# Altium PCB BioZ.PcbDoc (part 3 of 3)
Units mm, origin at the board's own origin, x right, y up, seen from the top; angles counter-clockwise.
Board outline 88 x 75 mm, 4 copper layers (Top Layer, GND1, GND 2, Bottom Layer), stack 1.564 mm thick; 175 components, 112 nets, 533 pads, 354 vias.
Unrouted connection lines stored in the file: 5.
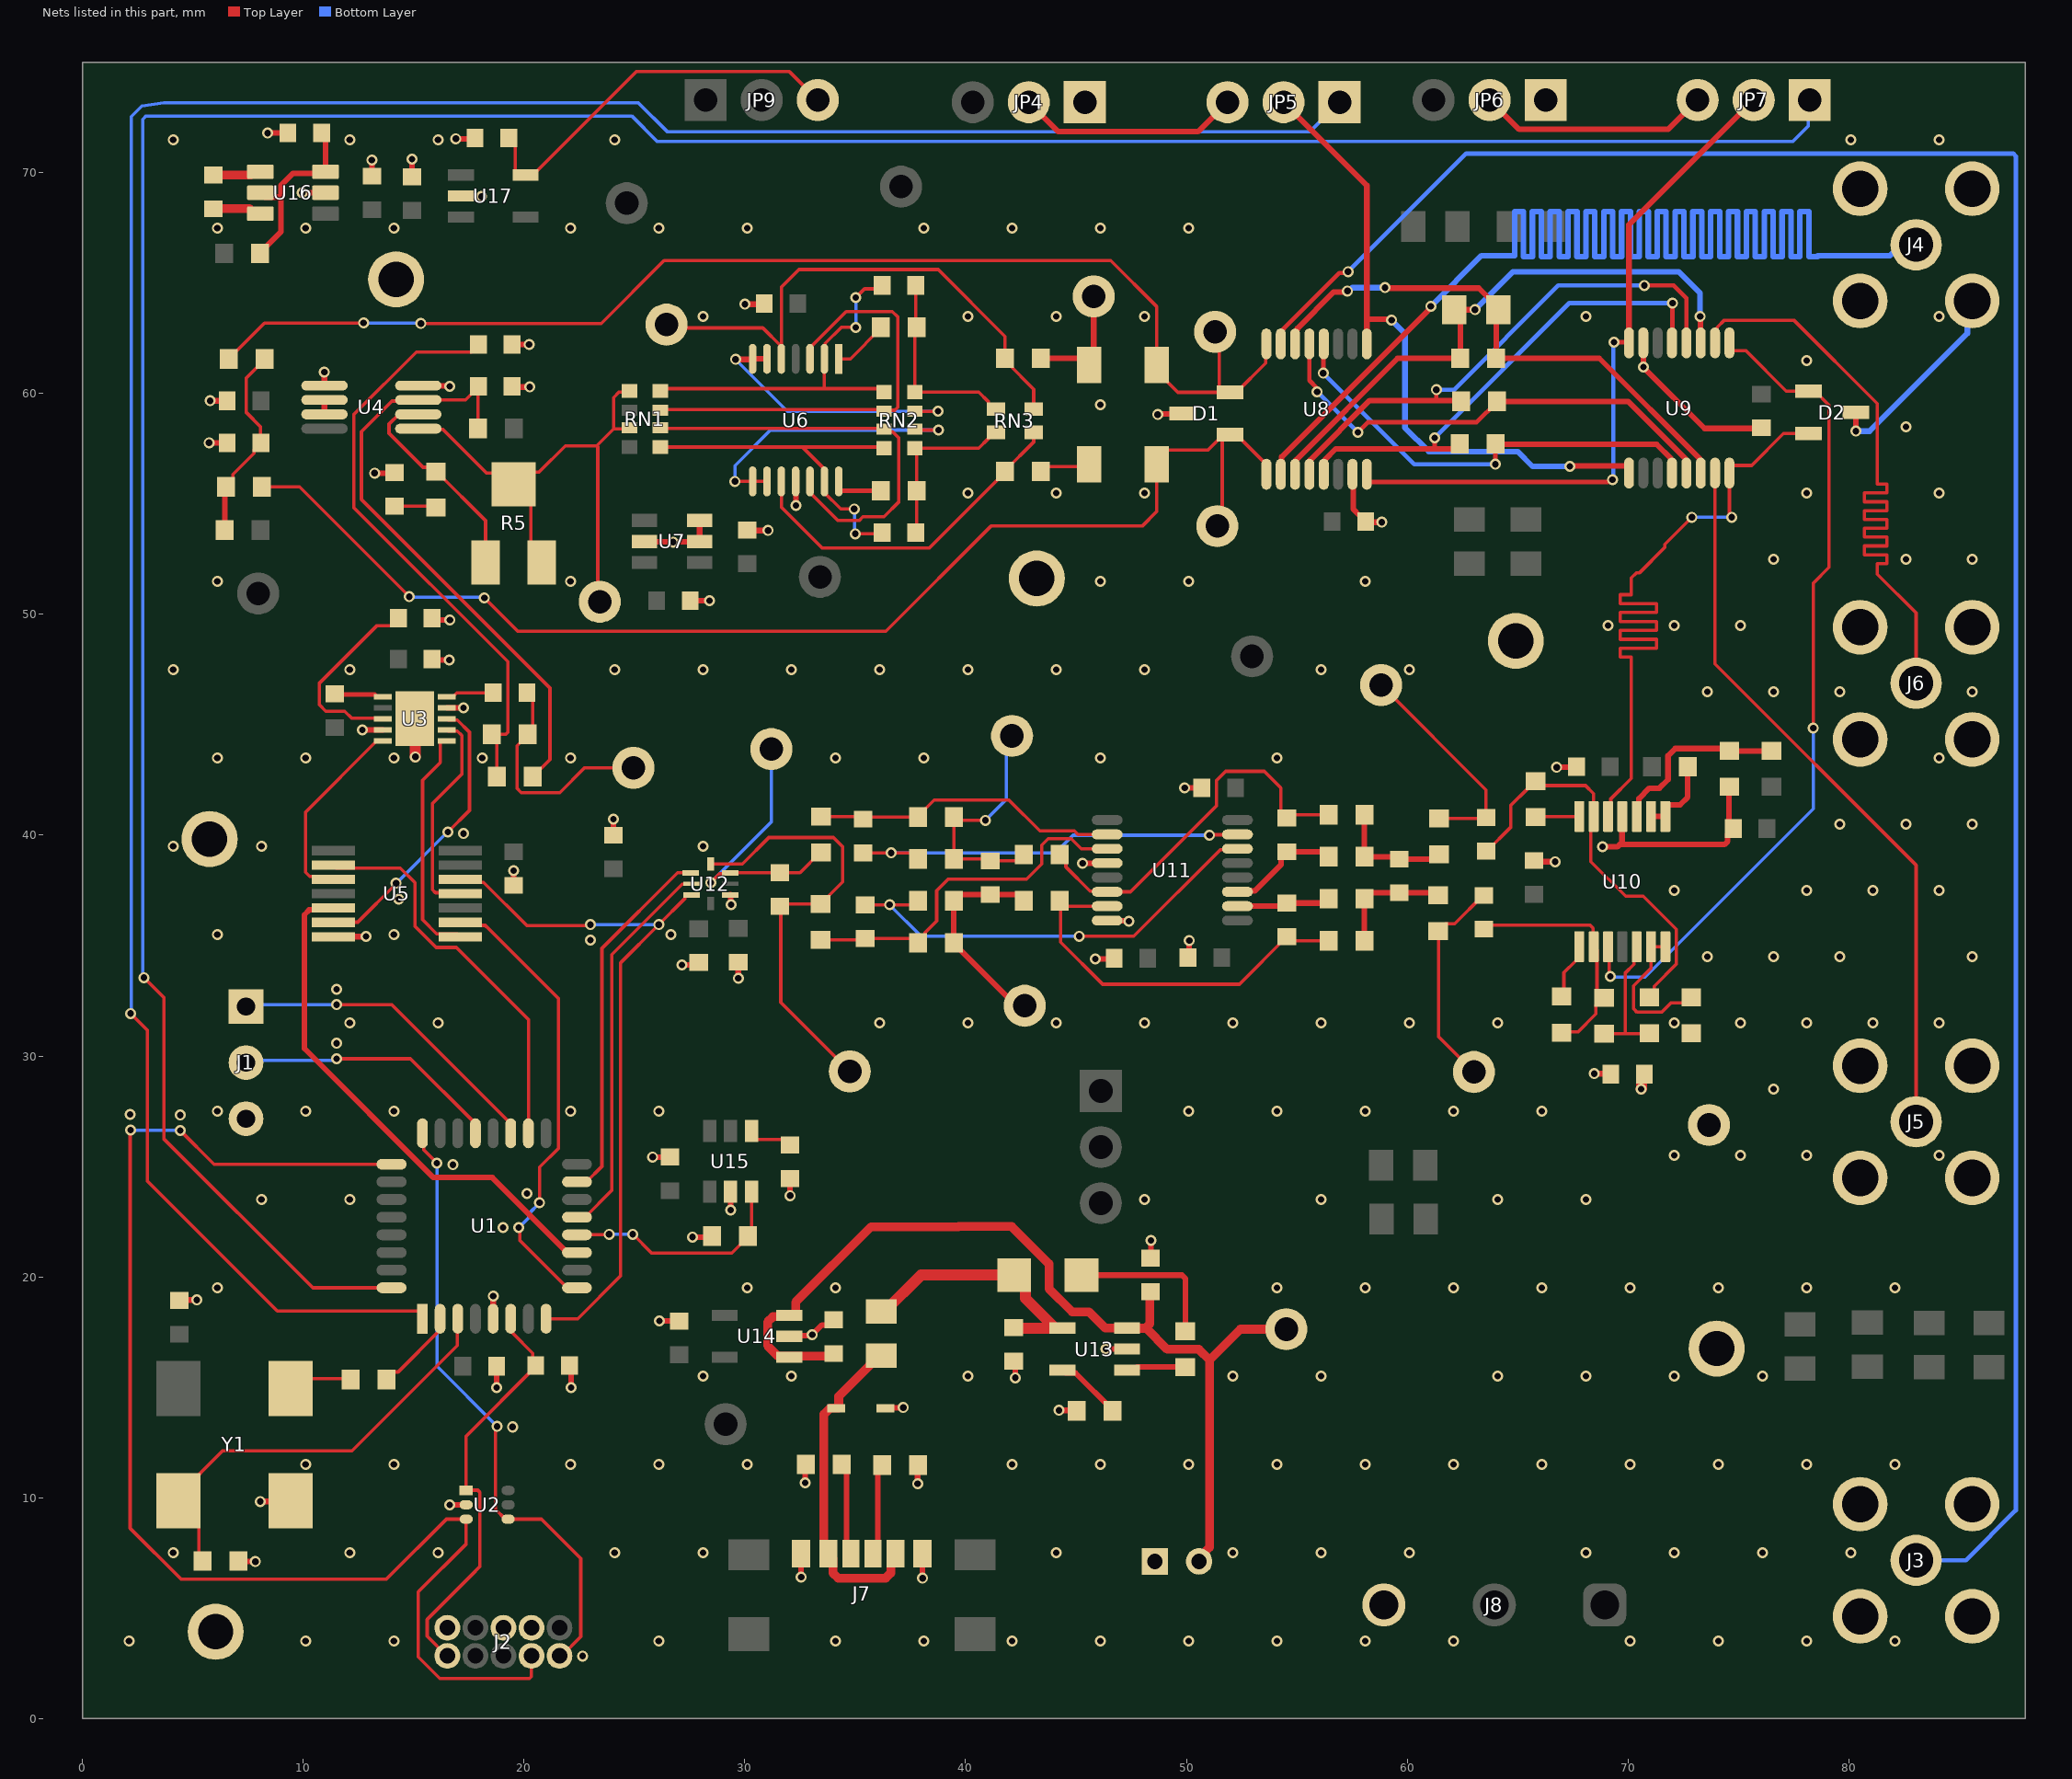
[diagram p4: the nets of this part, all layers, seen from the top]

## Via types
v1: diameter 0.5, hole 0.3, Top Layer to Bottom Layer, tented both sides, 354 vias

## Nets (pads, with @x,y where several pads share a name; then routed paths per layer and width w, separated by ;. In a path a pad name is that pad's centre, name@x,y a point inside that pad or via, vN(x,y) a via of type N, cw(c..) or ccw(c..) an arc to the next point about the centre after c; other vN are vias at no path point) (continued)
+V_BAT: C43.1 C44.1 P1.2 U13.3 U14.1 U14.3 VBAT.1 | length 45.3
  Top Layer w0.4: C44.1@34.025,16.526 33.903,16.404 32.066,16.404 U14.1@32.012,16.35 31.958,16.404 31.503,16.404 31.026,16.88 31.026,17.951 31.271,18.196 32.193,18.196 32.301,18.304 32.301,18.851 35.719,22.269 39.681,22.269 39.687,22.275 42.091,22.275 43.775,20.591 43.775,19.459 44.823,18.411 45.589,18.411 46.325,17.675 U13.3@47.312,17.675 47.572,17.675 48.146,17.675 48.337,17.866 C43.1@48.337,19.325 ; U13.3@47.559,17.675 47.572,17.662 48.188,17.662 49.131,16.719 50.56,16.719 51.05,16.229 ; P1.2@50.575,7.11 50.575,7.269 51.05,7.744 51.05,16.229 ; VBAT.1@54.525,17.625 52.446,17.625 51.05,16.229
+V_USB: C42.1 D4.1 F1.2 U13.4 | length 12.1
  Top Layer w0.5: F1.2@36.18,18.425 36.328,18.425 37.978,20.075 D4.1@42.201,20.075 42.713,19.563 42.713,19.017 U13.4@44.051,17.679 ; C42.1@42.175,17.7 42.2,17.675 U13.4@44.388,17.675
A0: JP5.2 U8.1 U9.1 | length 29.9
  Top Layer w0.254: JP5.2@54.4,73.2 58.175,69.425 58.175,63.363 ; U8.1@58.175,62.25 58.175,63.363 ; v1(59.3,63.325) 59.262,63.363 58.175,63.363 ; v1(67.375,56.7) 67.406,56.731 69.959,56.731 70.05,56.64 U9.1@70.05,56.4
  Bottom Layer w0.254: v1(59.3,63.325) 59.905,62.72 59.905,58.452 60.981,57.377 65.008,57.377 65.685,56.7 v1(67.375,56.7)
A1: JP7.2 U8.16 U9.16 | length 31.7
  Top Layer w0.2: U8.16@58.175,56.35 58.175,56.111 58.29,55.996 69.115,55.996 69.219,56.1 v1(69.3,56.1) ; v1(69.375,62.325) 70.025,62.325 U9.16@70.05,62.3
  Top Layer w0.254: U9.16@70.05,62.3 70.05,67.65 JP7.2@75.7,73.3
  Bottom Layer w0.2: v1(69.3,56.1) 69.337,56.137 69.337,62.288 v1(69.375,62.325)
BLEED: DNP12.2 R12.1 R13.2 R14.1 | length 9
  Top Layer w0.15: R13.2@6.499,55.775 6.806,56.081 6.806,56.338 7.768,57.3 7.768,57.469 DNP12.2@8.074,57.775 8.06,57.789 8.06,58.5 7.418,59.142 7.418,60.717 8.238,61.537 R12.1@8.238,61.575
  Top Layer w0.254: R14.1@6.437,53.825 6.437,55.713 R13.2@6.499,55.775
CAL_CAP_NEG: C22.1 R17.1 U8.6 U9.6 | length 25.1
  Top Layer w0.254: U8.6@54.925,62.25 54.925,62.778 55.023,62.876 55.023,62.954 56.672,64.603 57.253,64.603 v1(57.3,64.65) ; v1(59,64.8) 59.023,64.777 63.248,64.777 64.125,63.9 C22.1@64.125,63.8 64.038,63.713 R17.1@64.038,61.6 68.706,61.6 73.262,57.043 73.262,56.438 U9.6@73.3,56.4
  Bottom Layer w0.254: v1(57.3,64.65) 57.367,64.65 57.517,64.8 v1(59,64.8)
CAL_CAP_POS: C22.2 R17.2 U8.11 U9.11 | length 26.9
  Top Layer w0.254: U8.11@54.925,56.35 54.963,56.388 54.963,56.993 59.569,61.6 R17.2@62.412,61.6 62.412,63.513 C22.2@62.125,63.8 v1(63.071,63.8) ; v1(73.275,63.5) 73.287,63.488 73.287,62.313 U9.11@73.3,62.3
  Bottom Layer w0.254: v1(63.071,63.8) 64.796,65.525 72.3,65.525 73.275,64.55 v1(73.275,63.5)
CAL_HIGH_NEG: R16.1 U8.5 U9.5 | length 22.1
  Top Layer w0.2: U8.5@55.575,62.25 55.575,60.6 55.93,60.245 55.93,60.08 v1(55.925,60.075) ; v1(57.775,58.25) 58.231,58.706 63.157,58.706 64.063,59.612 R16.1@64.063,59.65
  Top Layer w0.254: R16.1@64.063,59.65 70.006,59.65 72.612,57.043 72.612,56.438 U9.5@72.65,56.4
  Bottom Layer w0.2: v1(55.925,60.075) 55.937,60.075 57.762,58.25 v1(57.775,58.25)
CAL_HIGH_POS: R16.2 U8.12 U9.12 | length 24.6
  Top Layer w0.2: 61.325,59.688 v1(61.325,60.175) ; v1(70.75,64.9) 72.075,64.9 72.65,64.325 U9.12@72.65,62.3
  Top Layer w0.254: U8.12@55.575,56.35 55.613,56.388 55.613,56.993 58.307,59.688 61.325,59.688 62.399,59.688 R16.2@62.437,59.65
  Bottom Layer w0.2: v1(61.325,60.175) 62.125,60.175 66.85,64.9 v1(70.75,64.9)
CAL_LOW_NEG: R15.1 U8.4 U9.4 | length 20.7
  Top Layer w0.2: v1(56.2,60.925) 56.212,60.937 56.212,62.238 U8.4@56.225,62.25 ; v1(64,56.8) 64,57.712 R15.1@64.013,57.725
  Top Layer w0.254: R15.1@64.013,57.725 64.032,57.706 71.3,57.706 71.962,57.043 71.962,56.438 U9.4@72,56.4
  Bottom Layer w0.2: v1(56.2,60.925) 60.325,56.8 v1(64,56.8)
CAL_LOW_POS: R15.2 U8.13 U9.13 | length 22.7
  Top Layer w0.2: 61.25,57.499 v1(61.25,58) ; U9.13@72,62.3 72.013,62.313 72.013,64.087 v1(72.025,64.1)
  Top Layer w0.254: U8.13@56.225,56.35 56.263,56.388 56.263,56.993 56.769,57.499 61.25,57.499 62.2,57.499 R15.2@62.387,57.687
  Bottom Layer w0.2: v1(61.25,58) 67.35,64.1 v1(72.025,64.1)
EXC_EXT_NEG: J3.SIG U8.7 | length 104
  Top Layer w0.2: U8.7@54.275,62.25 54.275,62.793 54.4,62.918 54.4,62.942 56.925,65.468 57.268,65.468 v1(57.325,65.525)
  Bottom Layer w0.2: v1(57.325,65.525) 62.675,70.875 87.458,70.875 87.575,70.758 87.575,9.424 85.311,7.16 J3.SIG@83.06,7.16
EXC_EXT_POS: J4.SIG U8.10 | length 102.6
  Top Layer w0.254: U8.10@54.275,56.35 54.313,56.388 54.313,57.132 61.071,63.89 v1(61.071,63.95)
  Bottom Layer w0.254: v1(61.071,63.95) 63.371,66.25 64.739,66.25 64.866,66.25 64.866,68.241 65.27,68.241 65.27,66.209 65.674,66.209 65.674,68.241 66.078,68.241 66.078,66.209 66.482,66.209 66.482,68.241 66.886,68.241 66.886,66.209 67.29,66.209 67.29,68.241 67.694,68.241 67.694,66.209 68.098,66.209 68.098,68.241 68.502,68.241 68.502,66.209 68.906,66.209 68.906,68.241 69.31,68.241 69.31,66.209 69.714,66.209 69.714,68.241 70.118,68.241 70.118,66.209 70.522,66.209 70.522,68.241 70.926,68.241 70.926,66.209 71.33,66.209 71.33,68.241 71.734,68.241 71.734,66.209 72.138,66.209 72.138,68.241 72.542,68.241 72.542,66.209 72.946,66.209 72.946,68.241 73.35,68.241 73.35,66.209 73.754,66.209 73.754,68.241 74.158,68.241 74.158,66.209 74.562,66.209 74.562,68.241 74.966,68.241 74.966,66.209 75.37,66.209 75.37,68.241 75.774,68.241 75.774,66.209 76.178,66.209 76.178,68.241 76.582,68.241 76.582,66.209 76.986,66.209 76.986,68.241 77.39,68.241 77.39,66.209 77.794,66.209 77.794,68.241 78.198,68.241 78.198,66.209 78.602,66.209 78.602,66.25 78.749,66.25 81.876,66.25 81.969,66.344 82.664,66.344 J4.SIG@83.06,66.74
FSYNC/SPI1_NSS1: U1.11 U5.5 | length 23.7
  Top Layer w0.254: U5.5@11.35,36.7 11.266,36.617 10.266,36.617 10.045,36.396 10.045,30.339 15.886,24.498 18.554,24.498 21.952,21.1 U1.11@22.393,21.1
FSYNC/SPI1_NSS1_BUF: U3.8 U5.6 | length 13.1
  Top Layer w0.15: U5.6@11.35,36.05 11.36,36.06 12.464,36.06 14.2,37.795 v1(14.2,37.825) ; U3.8@16.495,45.275 16.548,45.223 16.968,45.223 17.524,44.666 17.524,41.124 v1(16.55,40.15)
  Bottom Layer w0.15: v1(14.2,37.825) 14.212,37.825 16.537,40.15 v1(16.55,40.15)
GND: C1.2 C2.1 C4.2 C5.2 C6.2 C7.2 C9.2 C10.1 C11.1 C12.2 C14.2 C18.2 C19.2 C20.2 C21.2 C23.2 C26.2 C29.2 C30.2 C34.2 C35.2 C38.2 C39.2 C40.2 C41.2 C42.2 C43.2 C44.2 C45.2 C46.2 C47.2 C48.2 C50.2 C51.2 C52.2 D1.3 D2.3 D3.2 DNP12.1 GND.1 J1.3 J2.3 J2.5 J2.9 J3.SHLD J4.SHLD J7.A12 J7.B12 J8.3 JP4.1 JP6.1 P1.1 R7.1 R38.1 R40.2 R41.2 R43.2 R44.1 U1.5 U2.2 U3.4 U3.9 U3.11 U4.4 U4.5 U5.7 U6.11 U7.2 U7.3 U7.5 U8.15 U9.15 U10.11 U11.12 U11.16 U12.5 U13.2 U14.2 U15.2 U16.2 U17.2 Y1.2 | length 88.4
  Top Layer w0.254: C11.1@4.375,18.925 4.401,18.951 v1(5.175,18.951) ; v1(5.725,57.775) DNP12.1@6.55,57.775 ; v1(5.775,59.675) C9.2@6.55,59.675 ; R7.1@7.063,7.125 7.088,7.1 v1(7.825,7.1) ; v1(8.05,9.825) 9.38,9.825 Y1.2@9.415,9.86 ; v1(8.375,71.8) C48.2@9.3,71.8 ; v1(9.95,69.1) U16.2@11,69.1 ; v1(10.95,60.975) 10.95,60.366 U4.5@10.953,60.363 ; U5.7@11.35,35.4 11.355,35.405 12.831,35.405 v1(12.836,35.41) ; v1(12.675,44.775) U3.4@13.605,44.775 ; C51.2@13.1,69.849 v1(13.1,70.575) ; v1(13.225,56.4) 14.1,56.4 C10.1@14.125,56.425 ; U3.11@14.925,45.15 U3.11@15.05,45.275 U3.11@15.075,45.25 ; C50.2@14.925,69.824 v1(14.925,70.624) ; U4.4@15.203,60.363 15.222,60.344 16.606,60.344 v1(16.625,60.325) ; C5.2@15.824,49.825 15.902,49.747 v1(16.635,49.747) ; C4.2@15.825,47.975 15.867,47.933 v1(16.613,47.933) ; U3.9@16.495,45.775 v1(17.25,45.775) ; v1(16.625,9.675) U2.2@17.375,9.675 ; v1(16.906,71.545) 17.746,71.545 C52.2@17.776,71.575 ; U17.2@17.138,68.95 17.15,68.937 18.063,68.937 v1(18.075,68.925) ; U1.5@18.593,18.1 18.597,18.104 18.597,19.122 v1(18.6,19.125) ; v1(18.75,14.975) C1.2@18.75,15.95 ; C7.2@19.449,60.325 19.474,60.3 v1(20.25,60.3) ; C6.2@19.449,62.225 v1(20.225,62.225) ; C12.2@19.525,37.726 v1(19.525,38.4) ; C2.1@22.05,15.975 22.125,15.9 v1(22.125,14.975) ; C35.2@24.05,39.999 v1(24.05,40.725) ; U7.5@25.45,53.3 25.463,53.287 26.738,53.287 v1(26.75,53.275) 26.762,53.287 27.937,53.287 U7.2@27.95,53.3 U7.3@27.95,54.25 ; v1(25.825,25.425) C46.2@26.6,25.425 ; v1(26.125,18) 27.024,18 C45.2@27.027,17.996 ; v1(27.15,34.125) 27.796,34.125 C38.2@27.909,34.238 ; C18.2@27.525,50.625 v1(28.4,50.625) ; v1(27.625,21.8) 28.462,21.8 R44.1@28.512,21.85 ; U12.5@29.325,37.3 29.348,37.3 29.35,37.298 29.35,36.875 v1(29.375,36.85) ; v1(29.35,23.025) U15.2@29.35,23.85 ; v1(29.7,33.525) C39.2@29.7,34.251 ; v1(30,64.05) 30.85,64.05 C14.2@30.875,64.075 ; C19.2@30.1,53.824 30.124,53.8 v1(31.05,53.8) ; U14.2@32.012,17.3 32.05,17.337 33.012,17.337 33.496,17.821 33.796,17.821 C44.2@34.025,18.05 ; v1(32.05,23.675) C47.2@32.05,24.451 ; U6.11@32.3,56.025 32.313,56.012 v1(32.313,54.937) ; v1(32.55,6.4) J7.B12@32.55,7.455 ; v1(32.725,10.675) 32.725,11.463 R41.2@32.762,11.5 ; D3.2@36.368,14.05 36.381,14.062 37.162,14.062 v1(37.175,14.075) ; v1(37.825,10.625) 37.825,11.462 R40.2@37.838,11.475 ; v1(38.05,6.35) J7.A12@38.05,7.455 ; C42.2@42.175,16.176 42.25,16.101 v1(42.25,15.425) ; v1(44.225,13.95) 45.012,13.95 R43.2@45.037,13.925 ; v1(45.3,38.725) 45.305,38.73 46.406,38.73 U11.12@46.412,38.736 ; v1(45.875,34.4) 46.701,34.4 C29.2@46.726,34.425 ; v1(46.35,16.725) U13.2@47.312,16.725 ; U11.16@46.412,36.136 46.43,36.118 47.382,36.118 v1(47.4,36.1) ; C43.2@48.375,20.849 48.4,20.874 v1(48.4,21.65) ; v1(48.7,59.05) 48.725,59.075 49.805,59.075 D1.3@49.83,59.1 ; v1(49.925,42.15) C34.2@50.701,42.15 ; C30.2@50.076,34.45 50.132,34.506 v1(50.132,35.232) ; U8.15@57.525,56.35 57.563,56.312 57.563,54.761 57.832,54.492 57.87,54.492 58.124,54.238 C20.2@58.124,54.2 58.149,54.175 v1(58.85,54.175) ; C23.2@65.75,38.849 65.799,38.8 v1(66.7,38.8) ; v1(66.775,43.075) 67.651,43.075 C41.2@67.676,43.1 ; v1(68.475,29.2) 69.2,29.2 C26.2@69.225,29.175 ; v1(68.85,39.475) 69.525,39.475 69.625,39.575 ; U10.11@69.75,40.85 69.735,40.835 69.735,39.685 69.625,39.575 ; U9.15@70.7,62.3 v1(70.7,61.2) 73.475,58.425 76.024,58.425 C21.2@76.05,58.451 ; R38.1@74.6,42.187 74.587,42.2 74.587,40.489 C40.2@74.776,40.3 74.522,40.046 74.522,39.724 74.373,39.575 69.625,39.575 ; D2.3@80.32,59.15 80.325,59.145 v1(80.325,58.3)
  Top Layer w0.5: v1(15.075,43.55) U3.11@15.075,45.25
  Bottom Layer w0.254: v1(80.325,58.3) 80.95,58.3 85.38,62.73 85.38,63.98 J4.SHLD@85.6,64.2
  other v1: 22.65,2.825 2.1,3.5 10.1,3.5 14.1,3.5 26.1,3.5 34.1,3.5 38.1,3.5 42.1,3.5 46.1,3.5 50.1,3.5 54.1,3.5 58.1,3.5 62.1,3.5 70.1,3.5 74.1,3.5 78.1,3.5 82.1,3.5 4.1,7.5 12.1,7.5 16.1,7.5 24.1,7.5 28.1,7.5 44.1,7.5 52.1,7.5 56.1,7.5 60.1,7.5 68.1,7.5 72.1,7.5 76.1,7.5 80.1,7.5 10.1,11.5 14.1,11.5 22.1,11.5 26.1,11.5 30.1,11.5 42.1,11.5 46.1,11.5 50.1,11.5 54.1,11.5 58.1,11.5 62.1,11.5 66.1,11.5 70.1,11.5 74.1,11.5 78.1,11.5 82.1,11.5 19.475,13.2 28.1,15.5 32.1,15.5 40.1,15.5 52.1,15.5 56.1,15.5 64.1,15.5 68.1,15.5 72.1,15.5 76.1,15.5 33.05,17.375 6.1,19.5 30.1,19.5 34.1,19.5 54.1,19.5 58.1,19.5 62.1,19.5 66.1,19.5 70.1,19.5 74.1,19.5 78.1,19.5 82.1,19.5 19.05,22.225 8.1,23.5 12.1,23.5 48.1,23.5 56.1,23.5 64.1,23.5 68.1,23.5 20.125,23.775 16.775,25.075 4.425,27.325 2.15,27.35 6.1,27.5 10.1,27.5 14.1,27.5 22.1,27.5 26.1,27.5 50.1,27.5 54.1,27.5 58.1,27.5 62.1,27.5 66.1,27.5 11.5,30.575 12.1,31.5 16.1,31.5 36.1,31.5 40.1,31.5 44.1,31.5 48.1,31.5 52.1,31.5 56.1,31.5 60.1,31.5 64.1,31.5 11.5,33.025 23,35.25 6.1,35.5 14.1,35.5 26.65,35.5 14.325,37.1 4.1,39.5 8.1,39.5 28.1,39.5 17.25,40.075 6.1,43.5 10.1,43.5 14.1,43.5 18.1,43.5 22.1,43.5 34.1,43.5 38.1,43.5 46.1,43.5 54.1,43.5 4.1,47.5 12.1,47.5 24.1,47.5 28.1,47.5 32.1,47.5 36.1,47.5 40.1,47.5 44.1,47.5 48.1,47.5 56.1,47.5 60.1,47.5 6.1,51.5 22.1,51.5 46.1,51.5 50.1,51.5 58.1,51.5 40.1,55.5 44.1,55.5 48.1,55.5 46.1,59.5 28.1,63.5 40.1,63.5 44.1,63.5 48.1,63.5 68.1,63.5 84.1,63.5 6.1,67.5 10.1,67.5 14.1,67.5 22.1,67.5 26.1,67.5 30.1,67.5 38.1,67.5 42.1,67.5 46.1,67.5 50.1,67.5 4.1,71.5 12.1,71.5 16.1,71.5 24.1,71.5 80.1,71.5 84.1,71.5
MCLK: U1.18 U5.2 | length 18.1
  Top Layer w0.15: U5.2@11.35,38.65 11.485,38.515 14.385,38.515 15.05,37.85 15.05,35.873 16.009,34.915 16.935,34.915 20.193,31.657 U1.18@20.193,26.5
MCLK_BUF: U3.5 U5.3 | length 9
  Top Layer w0.15: U5.3@11.35,38 11.214,38.135 10.287,38.135 10.097,38.326 10.097,41.044 13.328,44.275 U3.5@13.605,44.275
NetC3_2: C3.2 U3.1 | length 2.2
  Top Layer w0.2: C3.2@11.425,46.399 11.449,46.375 13.228,46.375 13.328,46.275 U3.1@13.605,46.275
NetC5_1: C5.1 U3.3 | length 8.9
  Top Layer w0.15: U3.3@13.605,45.275 13.58,45.3 12.189,45.3 11.873,45.616 11.019,45.616 10.731,45.904 10.731,46.894 13.318,49.481 13.994,49.481 14.3,49.787 C5.1@14.3,49.825
NetC6_1: C6.1 R1.2 R2.1 | length 27
  Top Layer w0.15: C6.1@17.925,62.225 17.925,62.187 17.619,61.881 15.115,61.881 12.278,59.044 12.278,54.846 19.257,47.867 19.257,44.663 19.169,44.575 R1.2@18.662,44.575 ; R1.2@18.537,44.575 R1.2@18.662,44.575 ; R2.1@18.762,42.65 18.762,44.475 R1.2@18.662,44.575
NetC7_1: C7.1 R2.2 R3.1 U4.3 | length 27.5
  Top Layer w0.15: R3.1@17.912,58.425 C7.1@17.912,60.274 ; C7.1@17.925,60.325 17.912,60.312 C7.1@17.912,60.274 ; R2.2@20.388,42.65 20.388,42.688 20.694,42.994 20.732,42.994 21.168,43.431 21.168,46.668 12.628,55.209 12.628,58.283 14.011,59.665 15.155,59.665 U4.3@15.203,59.713 17.351,59.713 C7.1@17.912,60.274
NetC8_1: C8.1 U3.10 | length 2.2
  Top Layer w0.15: U3.10@16.495,46.275 16.772,46.275 16.947,46.45 C8.1@18.601,46.45
NetC8_2: C8.2 R1.1 T1.1 | length 10.5
  Top Layer w0.15: C8.2@20.125,46.45 20.388,46.187 20.388,44.8 R1.1@20.163,44.575 20.163,44.537 19.675,44.049 19.675,42.123 19.867,41.93 21.612,41.93 22.731,43.05 T1.1@24.95,43.05
NetC10_2: C10.2 R4.1 | length 1.9
  Top Layer w0.15: C10.2@14.125,54.901 15.936,54.901 R4.1@16,54.837
NetC13_1: C13.1 RN1.8 RN2.1 U6.2 | length 16.8
  Top Layer w0.15: RN1.8@26.175,60.12 26.28,60.225 33.6,60.225 ; v1(35.025,63) 34.362,63 33.637,62.274 33.637,61.612 U6.2@33.6,61.575 33.6,60.225 ; v1(35.025,64.35) 35.421,64.746 36.059,64.746 C13.1@36.214,64.9 ; RN2.1@36.3,60.07 36.145,60.225 33.6,60.225
  Bottom Layer w0.15: v1(35.025,63) v1(35.025,64.35)
NetC13_2: C13.2 R8.2 RN2.8 RN3.1 | length 8.9
  Top Layer w0.15: C13.2@37.738,64.9 37.738,63.051 R8.2@37.789,63 37.7,62.911 RN2.8@37.7,60.07 40.598,60.07 41.025,59.644 41.025,59.531 41.255,59.3 RN3.1@41.368,59.3
NetC15_1: C15.1 RN1.5 RN2.4 U6.13 | length 16.7
  Top Layer w0.15: RN1.5@26.175,57.58 32.605,57.58 ; v1(34.95,54.775) 34.342,54.775 33.6,55.517 U6.13@33.6,56.025 33.583,56.041 33.583,56.602 32.605,57.58 ; v1(35,53.65) 36.164,53.65 C15.1@36.214,53.7 ; RN2.4@36.3,57.53 36.25,57.58 32.605,57.58
  Bottom Layer w0.15: v1(34.95,54.775) 34.975,54.75 34.975,53.675 v1(35,53.65)
NetC15_2: C15.2 R9.2 RN2.5 RN3.2 | length 7.9
  Top Layer w0.15: C15.2@37.738,53.7 37.789,53.751 R9.2@37.789,55.6 37.789,57.441 RN2.5@37.7,57.53 40.598,57.53 41.025,57.956 41.025,58.019 41.255,58.25 RN3.2@41.368,58.25
NetC16_1: C16.1 R10.2 T4.1 | length 5.5
  Top Layer w0.254: R10.2@43.413,61.6 45.3,61.6 C16.1@45.6,61.3 45.8,61.5 T4.1@45.8,64.4
NetC16_2: C16.2 D1.2 R12.2 T5.1 U8.8 | length 57.4
  Top Layer w0.15: R12.2@6.612,61.575 6.612,61.613 6.892,61.893 6.93,61.893 8.237,63.2 v1(12.725,63.2) ; v1(15.325,63.175) 23.488,63.175 26.338,66.025 46.575,66.025 48.648,63.952 C16.2@48.648,61.3 48.648,61.025 49.613,60.06 D1.2@51.67,60.06 ; T5.1@51.3,62.8 51.492,62.608 51.492,60.238 D1.2@51.67,60.06 ; U8.8@53.625,62.25 53.587,62.212 53.587,61.377 52.27,60.06 D1.2@51.97,60.06 D1.2@51.67,60.06
  Bottom Layer w0.15: v1(12.725,63.2) 12.738,63.187 15.313,63.187 v1(15.325,63.175)
NetC17_1: C17.1 R11.2 | length 2.3
  Top Layer w0.15: R11.2@43.413,56.475 43.638,56.7 45.5,56.7 C17.1@45.6,56.8
NetC17_2: C17.2 D1.1 R13.1 T6.1 U8.9 | length 58.7
  Top Layer w0.15: R13.1@8.125,55.775 9.825,55.775 v1(14.8,50.8) ; v1(18.2,50.75) 19.709,49.241 36.391,49.241 41.15,54 48,54 48.648,54.648 48.648,56.975 49.123,57.45 50.98,57.45 51.67,58.14 D1.1@51.855,58.14 ; T6.1@51.4,54 51.4,54.404 51.625,54.629 51.625,57.91 D1.1@51.855,58.14 ; U8.9@53.625,56.35 53.625,56.785 52.27,58.14 D1.1@51.97,58.14 ; D1.1@51.855,58.14 D1.1@51.97,58.14 ; D1.1@51.855,58.14 D1.1@51.97,58.14
  Bottom Layer w0.15: v1(14.8,50.8) 14.825,50.775 18.175,50.775 v1(18.2,50.75)
NetC24_1: C24.1 R22.1 T9.1 | length 9.8
  Top Layer w0.15: T9.1@63.025,29.275 61.425,30.875 61.425,35.637 R22.1@61.4,35.662 61.731,35.994 62.156,35.994 63.437,37.274 C24.1@63.475,37.274
NetC24_2: C24.2 R18.2 R20.1 U10.2 | length 11.6
  Top Layer w0.15: C24.2@63.475,35.75 63.65,35.925 68.29,35.925 68.428,35.787 68.428,34.972 U10.2@68.6,34.8 ; R18.2@67,31.062 67.025,31.087 67.732,31.087 68.556,31.911 68.556,32.306 68.674,32.425 R20.1@68.762,32.425 ; U10.2@68.45,34.95 U10.2@68.6,34.8 ; R20.1@68.712,32.425 R20.1@68.925,32.638 ; R20.1@68.75,32.463 68.6,32.613 U10.2@68.6,34.8
NetC25_1: C25.1 R24.1 T10.1 | length 10.1
  Top Layer w0.15: T10.1@58.831,46.794 63.575,42.05 C25.1@63.575,40.8 63.538,40.763 R24.1@61.45,40.763
NetC25_2: C25.2 R19.2 R21.2 U10.13 | length 18.8
  Top Layer w0.15: C25.2@63.575,39.276 63.613,39.276 64.687,40.35 64.687,41.338 65.456,42.106 R19.2@65.787,42.438 ; R19.2@65.825,42.438 66.013,42.25 68.081,42.25 68.45,41.881 U10.13@68.45,40.85 68.325,40.725 68.325,38.808 69.899,37.234 70.701,37.234 72.2,35.735 72.2,34.165 71.194,33.16 71.194,32.882 R21.2@70.975,32.663
NetC27_1: C27.1 R24.2 R27.1 R28.1 | length 5.4
  Top Layer w0.254: R28.1@58.063,40.925 R27.1@58.063,39.025 59.543,39.025 C27.1@59.649,38.919 61.232,38.919 R24.2@61.45,39.137
NetC27_2: C27.2 R22.2 R25.1 R26.1 | length 5.4
  Top Layer w0.254: R25.1@58.063,35.225 R26.1@58.063,37.125 58.333,37.395 61.293,37.395 R22.2@61.4,37.288
NetC28_1: C28.1 R26.2 U11.2 | length 4.3
  Top Layer w0.254: U11.2@52.312,36.786 54.411,36.786 C28.1@54.55,36.925 56.237,36.925 R26.2@56.437,37.125
NetC28_2: C28.2 R25.2 R29.1 U11.15 | length 18
  Top Layer w0.15: R29.1@44.263,37.025 R29.1@44.3,36.988 ; U11.15@46.412,36.786 44.502,36.786 R29.1@44.3,36.988 ; R25.2@56.437,35.225 54.726,35.225 C28.2@54.55,35.401 52.399,33.25 46.209,33.25 44.3,35.159 R29.1@44.3,36.988
NetC31_1: C31.1 R27.2 U11.3 | length 5.2
  Top Layer w0.254: U11.3@52.312,37.436 52.35,37.474 53.099,37.474 54.298,38.673 54.298,38.999 C31.1@54.55,39.251 56.211,39.251 R27.2@56.437,39.025
NetC31_2: C31.2 R28.2 R30.1 U11.14 | length 17.6
  Top Layer w0.15: R30.1@44.263,39.125 44.542,38.846 44.542,38.565 45.634,37.474 46.374,37.474 U11.14@46.412,37.436 47.466,37.436 51.357,41.327 51.357,42.471 51.78,42.894 53.531,42.894 54.283,42.142 54.283,41.042 C31.2@54.55,40.775 54.7,40.925 R28.2@56.437,40.925
NetC32_1: C32.1 R30.2 R33.1 R34.1 T13.1 | length 11.1
  Top Layer w0.15: v1(40.9,40.675) 39.613,40.675 R34.1@39.463,40.825 R33.1@39.463,38.925 41.023,38.925 C32.1@41.113,38.835 42.358,38.835 42.637,39.114 R30.2@42.637,39.125
  Bottom Layer w0.15: v1(40.9,40.675) 41.85,41.625 41.85,44.25 T13.1@42.1,44.5
NetC32_2: C32.2 R29.2 R31.1 R32.1 T12.1 | length 9.8
  Top Layer w0.254: R31.1@39.463,35.125 R31.1@39.463,35.087 ; R29.2@42.637,37.025 42.637,37.031 42.358,37.311 C32.2@41.113,37.311 39.742,37.311 39.463,37.031 R32.1@39.463,37.025 R31.1@39.463,35.087 ; T12.1@42.675,32.275 42.275,32.275 R31.1@39.463,35.087
NetC33_1: C33.1 R32.2 U11.6 | length 20.4
  Top Layer w0.15: C33.1@35.45,36.849 v1(36.556,36.849) 37.661,36.849 R32.2@37.837,37.025 ; v1(45.15,35.425) 47.62,35.425 51.541,39.346 52.272,39.346 U11.6@52.312,39.386
  Bottom Layer w0.15: v1(36.556,36.849) 37.98,35.425 v1(45.15,35.425)
NetC33_2: C33.2 R31.2 R36.2 U11.11 | length 16.9
  Top Layer w0.15: R36.2@33.206,35.482 R36.2@33.425,35.262 35.387,35.262 C33.2@35.45,35.325 37.75,35.325 37.837,35.238 R31.2@37.837,35.125 ; R31.2@37.842,35.271 37.945,35.271 38.169,35.494 38.169,35.598 38.688,36.117 38.688,37.49 39.207,38.009 42.761,38.009 43.45,38.698 43.45,39.552 43.742,39.845 44.783,39.845 45.242,39.386 U11.11@46.412,39.386
NetC36_1: C36.1 R33.2 U11.7 | length 18.6
  Top Layer w0.15: C36.1@35.35,39.201 35.351,39.2 37.562,39.2 R33.2@37.837,38.925 ; v1(51.05,40) 51.068,40.018 52.294,40.018 U11.7@52.312,40.036
  Bottom Layer w0.15: v1(36.625,39.2) 44.066,39.2 44.866,40 v1(51.05,40)
NetC36_2: C36.2 R34.2 R35.2 U11.10 | length 14.2
  Top Layer w0.15: R35.2@33.45,40.838 35.437,40.838 C36.2@35.45,40.825 ; U11.10@46.412,40.036 45.087,40.036 44.928,40.195 43.359,40.195 41.957,41.597 38.571,41.597 37.837,40.863 R34.2@37.837,40.825 C36.2@35.45,40.825 ; C36.2@35.45,40.825 C36.2@35.35,40.725 C36.2@35.45,40.825
NetC37_1: C37.1 R35.1 T14.1 U12.7 | length 12.8
  Top Layer w0.15: v1(28.45,37.85) 28.85,38.25 29.275,38.25 U12.7@29.325,38.3 C37.1@31.588,38.299 ; C37.1@31.588,38.299 32.499,38.299 33.412,39.212 R35.1@33.45,39.212
  Bottom Layer w0.15: v1(28.45,37.85) 31.2,40.6 T14.1@31.2,43.9
NetC37_2: C37.2 R36.1 T15.1 U12.8 | length 20.3
  Top Layer w0.15: U12.8@28.45,38.7 29.888,38.7 31.082,39.894 34.008,39.894 34.425,39.477 34.425,37.888 R36.1@33.425,36.888 31.701,36.888 C37.2@31.588,36.775 31.626,36.737 31.626,32.424 T15.1@34.75,29.3
NetC47_1: C47.1 U15.4 | length 2.1
  Top Layer w0.15: U15.4@30.3,26.6 30.3,26.45 30.525,26.225 31.8,26.225 C47.1@32.05,25.975
NetC48_1: C48.1 R45.2 U16.3 U16.5 | length 8.6
  Top Layer w0.254: R45.2@8.038,66.35 8.038,66.388 8.977,67.327 8.977,68.866 ; U16.5@8.05,69.1 8.248,68.902 8.941,68.902 8.977,68.866 ; C48.1@10.824,71.8 11,71.624 U16.3@11,70.05 10.92,69.97 9.52,69.97 8.977,69.427 8.977,68.866
NetC49_1: C49.1 U16.6 | length 2.2
  Top Layer w0.4: C49.1@5.925,68.375 7.55,68.375 7.775,68.15 U16.6@8.05,68.15
NetC49_2: C49.2 U16.4 | length 2.2
  Top Layer w0.4: C49.2@5.925,69.899 7.624,69.899 7.775,70.05 U16.4@8.05,70.05
NetC52_1: C52.1 JP9.3 U17.5 | length 17.9
  Top Layer w0.15: C52.1@19.3,71.575 19.6,71.275 19.6,70.079 19.779,69.9 20.395,69.9 25.076,74.582 32.018,74.582 JP9.3@33.3,73.3
NetD2_1: D2.1 U9.9 U10.3 | length 38.2
  Top Layer w0.15: U10.3@69.1,34.95 69.15,34.9 69.15,33.65 v1(69.2,33.6) ; U9.9@74.6,62.3 74.6,62.043 74.691,61.952 75.336,61.952 77.178,60.11 D2.1@78.18,60.11 78.48,60.11 79.112,59.478 79.112,52.13 78.4,51.418 v1(78.4,44.85)
  Bottom Layer w0.15: v1(69.2,33.6) 69.225,33.575 70.775,33.575 78.4,41.2 v1(78.4,44.85)
NetD2_2: D2.2 U9.8 U10.12 | length 34.4
  Top Layer w0.15: U10.12@69.1,40.85 69.225,40.975 69.225,41.645 70.15,42.57 70.15,47.99 70.15,48.065 69.649,48.065 69.649,48.469 71.297,48.469 71.297,48.873 69.649,48.873 69.649,49.277 71.297,49.277 71.297,49.681 69.649,49.681 69.649,50.085 71.297,50.085 71.297,50.489 69.649,50.489 69.649,50.893 70.15,50.893 70.15,51.35 70.15,51.65 70.376,51.877 70.514,51.877 71.673,53.036 71.673,53.173 v1(72.9,54.4) ; v1(74.7,54.4) 74.7,54.481 74.6,54.581 U9.8@74.6,56.4 74.6,56.657 74.691,56.748 75.61,56.748 77.052,58.19 D2.2@78.18,58.19
  Bottom Layer w0.15: v1(72.9,54.4) v1(74.7,54.4)
NetD3_1: D3.1 F1.1 J7.A9 J7.B9 | length 15.2
  Top Layer w0.4: F1.1@36.18,16.425 36.031,16.425 35.681,16.075 35.681,16.015 34.252,14.586 34.252,14.062 34.24,14.05 33.858,14.05 33.581,13.773 33.581,7.654 33.986,7.249 33.986,6.584 34.221,6.35 36.379,6.35 36.614,6.584 36.614,7.264 J7.A9@36.85,7.5
NetD4_2: D4.2 R42.2 | length 7.2
  Top Layer w0.254: D4.2@45.249,20.075 49.801,20.075 49.95,19.926 R42.2@49.95,17.538
NetJ7_A5: J7.A5 R41.1 | length 4.2
  Top Layer w0.254: R41.1@34.388,11.5 34.6,11.288 34.6,7.655 J7.A5@34.8,7.455
NetJ7_B5: J7.B5 R40.1 | length 4.2
  Top Layer w0.254: J7.B5@35.8,7.455 36.025,7.68 36.025,11.288 R40.1@36.212,11.475
NetJP4_2: JP4.2 JP5.3 | length 10.1
  Top Layer w0.254: JP4.2@42.86,73.2 44.194,71.867 50.527,71.867 JP5.3@51.86,73.2
NetJP5_1: JP5.1 U1.1 | length 119.6
  Top Layer w0.15: v1(2.175,31.925) 2.925,31.175 2.925,24.349 8.82,18.454 15.277,18.454 15.393,18.338 U1.1@15.393,18.225
  Bottom Layer w0.15: v1(2.175,31.925) 2.198,31.948 2.198,72.541 2.686,73.029 3.675,73.175 25.172,73.175 26.481,71.867 55.607,71.867 JP5.1@56.94,73.2
NetJP6_2: JP6.2 JP7.3 | length 10.5
  Top Layer w0.254: JP6.2@63.74,73.3 65.073,71.967 71.827,71.967 JP7.3@73.16,73.3
NetJP7_1: JP7.1 U1.32 | length 137.2
  Top Layer w0.15: v1(2.775,33.55) 3.675,32.65 3.675,26.25 10.425,19.5 U1.32@13.993,19.5
  Bottom Layer w0.15: v1(2.775,33.55) 2.728,33.597 2.728,33.771 2.725,33.774 2.725,72.426 2.874,72.575 24.875,72.575 26.025,71.425 77.475,71.425 78.165,72.115 78.165,73.225 JP7.1@78.24,73.3
NetR4_2: R4.2 R5.1 U4.2 | length 9.8
  Top Layer w0.15: U4.2@15.203,59.063 14.321,59.063 13.878,58.62 13.878,58.206 15.418,56.666 15.797,56.666 R4.2@16,56.463 16.038,56.463 18.255,54.246 R5.1@18.255,52.347
NetR5_2: R5.2 R5.3 RN1.1 RN1.3 T2.1 U4.1 | length 25.1
  Top Layer w0.15: U4.1@15.203,58.413 15.241,58.375 16.325,58.375 18.293,56.407 19.021,56.407 R5.2@19.525,55.903 ; R5.3@20.795,52.347 20.795,52.697 20.3,53.192 20.3,55.128 R5.2@19.525,55.903 ; 23.283,57.637 23.337,57.583 23.337,50.663 T2.1@23.425,50.575 ; RN1.3@24.775,58.45 24.729,58.404 24.05,58.404 ; RN1.1@24.775,60.12 24.718,60.063 24.288,60.063 24.05,59.825 24.05,58.404 ; R5.2@19.525,55.903 20.059,56.437 20.662,56.437 21.862,57.637 23.283,57.637 24.05,58.404
NetR6_2: R6.2 Y1.3 | length 2.9
  Top Layer w0.15: Y1.3@9.415,14.94 9.863,15.388 12.099,15.388 R6.2@12.137,15.35
NetR8_1: R8.1 U6.1 | length 2.5
  Top Layer w0.15: U6.1@34.25,61.575 34.776,61.575 36.163,62.962 R8.1@36.163,63
NetR9_1: R9.1 U6.14 | length 2.3
  Top Layer w0.2: U6.14@34.25,56.025 34.25,55.665 34.315,55.6 R9.1@36.163,55.6
NetR10_1: R10.1 RN3.4 T3.1 U6.5 | length 24.2
  Top Layer w0.15: T3.1@26.45,63.125 26.6,62.975 30.811,62.975 31.633,62.153 31.633,61.592 U6.5@31.65,61.575 ; U6.5@31.65,62.098 31.65,64.825 32.444,65.619 38.756,65.619 41.787,62.588 R10.1@41.787,61.6 ; R10.1@41.9,61.382 43.082,60.2 RN3.4@43.082,59.3
NetR11_1: R11.1 RN3.3 U6.10 | length 15.8
  Top Layer w0.15: U6.10@31.65,56.025 31.65,54.858 33.502,53.006 38.356,53.006 41.787,56.437 R11.1@41.787,56.475 41.787,56.513 43.081,57.807 RN3.3@43.082,58.25
NetR18_1: R18.1 U10.1 | length 3.3
  Top Layer w0.15: R18.1@67,32.688 67.1,32.788 67.1,33.775 U10.1@67.65,34.325 ; U10.1@67.65,34.325 U10.1@67.8,34.475 ; U10.1@67.65,34.325 U10.1@67.8,34.475 ; U10.1@67.8,34.475 U10.1@67.8,34.95 U10.1@67.8,34.475
NetR19_1: R19.1 U10.14 | length 2
  Top Layer w0.15: R19.1@65.825,40.812 65.863,40.85 U10.14@67.8,40.85
NetR20_2: R20.2 R21.1 U10.5 | length 6.2
  Top Layer w0.15: R20.2@68.925,31.012 69.875,31.012 ; U10.5@70.4,34.95 70.28,34.83 70.28,34.155 69.875,33.75 69.875,31.012 ; R21.1@70.975,31.037 70.95,31.012 69.875,31.012
NetR23_1: R23.1 U10.6 U10.7 | length 6.8
  Top Layer w0.15: U10.7@71.7,34.95 U10.6@71.05,34.95 71.05,33.978 70.255,33.183 70.255,32.142 70.417,31.981 71.533,31.981 71.952,32.4 72.613,32.4 R23.1@72.875,32.663
NetR37_1: R37.1 R38.2 U10.10 | length 8.5
  Top Layer w0.254: U10.10@70.4,40.85 70.498,40.948 70.498,41.656 70.971,42.129 71.43,42.129 71.821,42.52 71.821,43.598 72.149,43.925 74.487,43.925 R38.2@74.6,43.813 R37.1@76.5,43.813
NetR39_1: R39.1 U10.8 U10.9 | length 4.2
  Top Layer w0.254: U10.9@71.05,40.85 71.602,40.85 71.7,40.948 71.7,41.35 U10.8@71.7,40.85 ; U10.8@71.7,41.276 71.798,41.374 72.361,41.374 72.713,41.726 R39.1@72.713,43.1
NetR42_1: R42.1 U13.1 | length 2.7
  Top Layer w0.254: U13.1@47.312,15.775 47.645,15.775 47.782,15.912 R42.1@49.95,15.912
NetR43_1: R43.1 U13.5 | length 3.1
  Top Layer w0.254: U13.5@44.388,15.775 44.515,15.648 44.978,15.648 46.663,13.963 R43.1@46.663,13.925 R43.1@46.65,13.912
NetR44_2: R44.2 U1.12 U15.3 | length 10.5
  Top Layer w0.15: U1.12@22.393,21.9 22.405,21.912 23.837,21.912 v1(23.85,21.925) ; v1(24.925,21.925) 25.772,21.078 29.404,21.078 30.138,21.812 R44.2@30.138,21.85 30.3,22.012 U15.3@30.3,23.85
  Bottom Layer w0.15: v1(23.85,21.925) v1(24.925,21.925)
NetRN1_6: RN1.6 RN2.3 U6.12 | length 19.3
  Top Layer w0.15: RN1.6@26.175,58.45 26.2,58.425 36.275,58.425 RN2.3@36.3,58.4 36.423,58.277 36.685,58.277 36.977,57.985 36.977,55.101 36.301,54.425 35.347,54.425 35.172,54.25 34.217,54.25 32.95,55.517 U6.12@32.95,56.025
NetRN1_7: RN1.7 RN2.2 U6.3 | length 20.2
  Top Layer w0.15: RN1.7@26.398,59.273 RN2.2@36.227,59.273 ; U6.3@32.95,61.575 32.95,62.083 34.587,63.719 36.683,63.719 36.925,63.478 36.925,59.387 36.787,59.249 36.349,59.249 RN2.2@36.3,59.2
  Top Layer w0.254: RN1.7@26.175,59.25 26.375,59.25 RN1.7@26.398,59.273 ; RN2.2@36.227,59.273 RN2.2@36.3,59.2
NetRN2_6: RN2.6 U6.8 U6.9 | length 13.2
  Top Layer w0.15: v1(29.55,56.025) U6.8@30.35,56.025 ; U6.8@30.35,56.025 U6.9@31,56.025 ; RN2.6@37.7,58.4 37.75,58.35 v1(38.775,58.35)
  Bottom Layer w0.15: v1(29.55,56.025) 29.55,56.742 31.158,58.35 v1(38.775,58.35)
NetRN2_7: RN2.7 U6.6 U6.7 | length 12.6
  Top Layer w0.15: RN2.7@37.7,59.2 v1(38.75,59.2)
  Top Layer w0.254: v1(29.575,61.55) 30.325,61.55 U6.7@30.35,61.575 U6.6@31,61.575
  Bottom Layer w0.15: v1(29.575,61.55) 31.925,59.2 v1(38.75,59.2)
NetU1_13: U1.13 U12.2 | length 17.7
  Top Layer w0.15: U1.13@22.393,22.7 22.76,22.7 23.975,23.915 23.975,34.589 27.161,37.775 27.55,37.775 U12.2@27.575,37.8
NetU1_15: U1.15 U12.1 | length 16.7
  Top Layer w0.15: U1.15@22.393,24.3 22.828,24.3 23.525,24.997 23.525,34.875 26.95,38.3 U12.1@27.55,38.3
NetU4_6: U4.6 U4.7 | length 0.6
  Top Layer w0.254: U4.7@10.953,59.063 U4.6@10.953,59.713
NRST: C2.2 J2.10 U1.6 U2.1 | length 18.7
  Top Layer w0.15: J2.10@16.52,2.83 16.499,2.83 15.607,3.722 15.607,4.479 17.775,6.648 17.775,6.66 17.985,6.87 17.985,10.25 17.897,10.338 17.375,10.338 17.375,12.786 20.526,15.937 C2.2@20.526,15.975 20.394,16.107 20.394,16.531 19.457,17.468 19.457,17.72 U1.6@19.393,17.784
OSC32_EN: R7.2 U1.3 Y1.1 | length 20.1
  Top Layer w0.15: R7.2@5.437,7.125 5.26,7.302 5.26,8.935 Y1.1@4.335,9.86 4.335,10.11 6.337,12.112 12.199,12.112 16.885,16.798 16.973,16.886 16.973,18.08 U1.3@16.993,18.1
OSC32_IN: R6.1 U1.2 | length 3.9
  Top Layer w0.15: R6.1@13.763,15.35 13.763,15.358 14.094,15.69 14.292,15.69 16.193,17.591 U1.2@16.193,18.1
SNS_EXT_NEG: J5.SIG U9.7 | length 33.2
  Top Layer w0.15: U9.7@73.95,56.4 73.95,47.753 83.06,38.643 J5.SIG@83.06,27.02
SNS_EXT_POS: J6.SIG U9.10 | length 32.2
  Top Layer w0.15: U9.10@73.95,62.3 73.95,62.828 74.048,62.926 74.048,63.004 74.371,63.327 77.515,63.327 81.3,59.542 81.3,55.975 81.3,55.9 81.736,55.9 81.736,55.5 80.71,55.5 80.71,55.1 81.736,55.1 81.736,54.7 80.71,54.7 80.71,54.3 81.736,54.3 81.736,53.9 80.71,53.9 80.71,53.5 81.736,53.5 81.736,53.1 80.71,53.1 80.71,52.7 81.736,52.7 81.736,52.3 81.3,52.3 81.3,51.879 81.3,51.825 83.06,50.065 J6.SIG@83.06,46.88
SPI1_MOSI: U1.9 U5.9 | length 21.1
  Top Layer w0.15: U5.9@17.1,36.05 17.236,35.915 18.234,35.915 18.403,35.746 18.405,35.746 21.563,32.588 21.563,25.829 20.7,24.966 v1(20.7,23.35) ; v1(19.75,22.225) 19.797,22.178 19.797,21.655 21.952,19.5 U1.9@22.393,19.5
  Bottom Layer w0.15: v1(19.75,22.225) 20.208,22.683 20.208,22.858 v1(20.7,23.35)
SPI1_MOSI_BUF: U3.6 U5.8 | length 10.7
  Top Layer w0.15: U3.6@16.495,44.275 16.254,44.275 16.201,44.223 16.201,43.916 16.2,43.915 16.2,43.292 15.4,42.492 15.4,36.173 16.038,35.535 16.965,35.535 U5.8@17.1,35.4
SPI1_SCK: U1.8 U5.12 U12.3 | length 32.8
  Top Layer w0.15: U5.12@17.1,38 17.236,37.865 18.163,37.865 20.127,35.9 22.95,35.9 v1(23,35.95) ; U1.8@20.993,18.1 22.425,18.1 24.375,20.05 24.375,34.225 v1(26.1,35.95) 27.275,37.125 27.275,37.25 27.325,37.3 U12.3@27.575,37.3
  Bottom Layer w0.15: v1(23,35.95) v1(26.1,35.95)
SPI1_SCK_BUF: U3.7 U5.11 | length 9.6
  Top Layer w0.15: U3.7@16.495,44.775 16.548,44.723 16.968,44.723 17.174,44.516 17.174,42.767 15.848,41.44 15.848,37.533 15.986,37.395 17.055,37.395 U5.11@17.1,37.35
SWCLK: J2.4 U1.25 U2.3 | length 61.5
  Top Layer w0.15: v1(2.175,26.65) 2.15,26.625 2.15,8.609 4.459,6.3 13.755,6.3 16.48,9.025 U2.3@17.375,9.025 17.375,7.9 15.205,5.73 15.205,2.78 16.182,1.803 20.242,1.803 20.33,1.891 J2.4@20.33,2.83 ; v1(4.425,26.625) 5.95,25.1 U1.25@13.993,25.1
  Bottom Layer w0.15: v1@2.187,26.638 v1@4.412,26.638
  Bottom Layer w0.254: v1(2.175,26.65) v1@2.187,26.638 ; v1@4.412,26.638 v1(4.425,26.625)
SWDIO: J2.2 U1.24 U2.4 | length 28.1
  Top Layer w0.15: U1.24@15.393,26.5 15.445,26.448 15.445,25.755 15.696,25.504 v1(16.05,25.15) ; v1(18.775,13.225) 18.775,13.13 18.7,13.055 18.7,9.474 19.149,9.025 U2.4@19.275,9.025 20.785,9.025 22.565,7.245 22.565,3.7 21.695,2.83 J2.2@21.6,2.83
  Bottom Layer w0.15: v1(16.05,25.15) 16.05,15.95 v1(18.775,13.225)
UART_RX: J1.2 U1.21 | length 12.1
  Top Layer w0.15: v1(11.5,29.875) 14.853,29.875 17.793,26.935 U1.21@17.793,26.5
  Bottom Layer w0.15: J1.2@7.4,29.7 7.508,29.808 11.433,29.808 v1(11.5,29.875)
UART_TX: J1.1 U1.19 | length 14.7
  Top Layer w0.15: v1(11.5,32.325) 14.003,32.325 19.393,26.935 U1.19@19.393,26.5
  Bottom Layer w0.15: J1.1@7.4,32.24 7.485,32.325 v1(11.5,32.325)
V_GUARD: C26.1 J5.SHLD J6.SHLD R23.2 VGUARD.1 | length 0.7
  Top Layer w0.5: v1(70.6,28.5) 70.618,28.518 70.618,29.044 C26.1@70.749,29.175
  other v1: 72.1,25.5 75.1,25.5 78.1,25.5 84.1,25.5 76.6,28.5 72.1,31.5 75.1,31.5 78.1,31.5 81.1,31.5 84.1,31.5 73.6,34.5 76.6,34.5 79.6,34.5 85.6,34.5 72.1,37.5 78.1,37.5 81.1,37.5 84.1,37.5 79.6,40.5 82.6,40.5 85.6,40.5 84.1,43.5 73.6,46.5 76.6,46.5 79.6,46.5 85.6,46.5 69.1,49.5 72.1,49.5 75.1,49.5 76.6,52.5 82.6,52.5 85.6,52.5 78.1,55.5 84.1,55.5 82.6,58.5 78.1,61.5
pads on no net: DNP1.1 DNP1.2 DNP2.1 DNP2.2 DNP3.1 DNP3.2 DNP4.1 DNP4.2 DNP5.1 DNP5.2 DNP6.1 DNP6.2 DNP7.1 DNP7.2 DNP8.1 DNP8.2 DNP9.1 DNP9.2 DNP10.1 DNP10.2 J2.6 J2.7 J2.8 J7.7 J7.8 J7.9 J7.10 U1.7 U1.10 U1.14 U1.16 U1.17 U1.20 U1.22 U1.23 U1.26 U1.27 U1.28 U1.29 U1.30 U1.31 U2.6 U8.3 U9.3 U14.4 U17.4

## Polygon pours and split planes (outlines as drawn)
V_GUARD on Bottom Layer "V_GUARD_L04_P001" (solid, pour order 1): 68.175,32.35 68.175,38.4 66.1,38.4 66.1,47.573 73.525,63.475 73.525,64.3 78.125,64.3 86.85,55.575 86.85,22.8 69.125,22.8 69.125,32.35
V_GUARD on Top Layer "GND" (solid, pour order 0): 68.15,32.366 68.15,38.4 66.1,38.4 66.1,47.573 73.525,64.3 78.125,64.3 86.85,55.575 86.85,22.8 69.1,22.8 69.1,32.366
GND on GND 2 (split plane): 87.49,0.51 0.51,0.51 0.51,74.49 87.49,74.49
V_GUARD on GND 2 (split plane): 86.742,55.53 86.772,55.506 86.772,23.113 70.436,23.113 70.2,23.35 70.2,39.062 70.195,39.101 70.18,39.137 70.156,39.169 68.125,41.2 68.125,47.4 68.131,47.405 68.155,47.436 68.17,47.473 68.175,47.512 68.175,57.874 74.386,64.086 78.186,64.086
GND on GND1 (split plane): 87.49,0.51 0.51,0.51 0.51,74.49 87.49,74.49
V_GUARD on GND1 (split plane): 86.743,55.568 86.774,55.544 86.774,23.151 70.438,23.151 70.201,23.388 70.201,39.1 70.196,39.139 70.181,39.176 70.157,39.207 68.126,41.238 68.126,47.439 68.132,47.443 68.156,47.474 68.171,47.511 68.176,47.55 68.176,57.912 74.388,64.124 78.187,64.124

## Other copper
GND1 (plane layer: these items are gaps in the copper):
  lines w0.3: 67.975,47.6 67.975,41.175 70.05,39.1 70.05,23.325 70.375,23 86.7,23 86.925,23 86.925,55.65 86.9,55.675 86.85,55.675 78.25,64.275 74.325,64.275 68.025,57.975 68.025,47.55
GND 2 (plane layer: these items are gaps in the copper):
  lines w0.3: 67.974,47.562 67.974,41.137 70.049,39.062 70.049,23.287 70.374,22.962 86.699,22.962 86.924,22.962 86.924,55.612 86.899,55.637 86.849,55.637 78.249,64.237 74.324,64.237 68.024,57.937 68.024,47.512

## Silkscreen, mask and mechanical layers (free items; w line width, h text height)
Top Overlay:
  text "+V" at 40.721,70.404 h0.76 r90
  text "A1" at 64.196,70.404 h1.02 r90
  text "A0" at 43.171,70.354 h0.76 r90
  text "A1" at 76.171,70.254 h1.02 r90
  text "+V" at 61.796,70.004 h1.02 r90
  text "A0" at 54.946,69.954 h1.02 r90
  text "GND" at 45.971,69.604 h0.76 r90
  text "+5V" at 31.371,69.029 h1.02 r90
  text "GND" at 66.871,68.979 h1.02 r90
  text "MCU" at 57.471,68.829 h1.02 r90
  text "MCU" at 78.821,68.704 h1.02 r90
  text "5V_INT" at 34.052,66.179 h1.02 r90
  text "MANUAL" at 73.471,65.929 h1.02 r90
  text "MANUAL" at 52.146,65.904 h1.02 r90
  text "DNPS-X2" at 60.104,65.129 h1.02
  text "+5V_EXT" at 28.652,64.979 h1.02 r90
  text "EXC_POS" at 79.179,61.116 h1.27
  text "DNPS-X2" at 66.929,52.179 h1.02
  text "SNS_POS" at 79.179,40.941 h1.27
  text "TX" at 9.004,32.029 h0.76
  text "RX" at 9.029,29.254 h0.76
  text "+3.3V_EXT" at 47.654,28.006 h0.76
  text "GND" at 8.979,26.804 h0.76
  text "+3.3V_SYS" at 47.829,25.481 h0.76
  text "+3.3V_BAT" at 47.829,22.856 h0.76
  text "SNS_NEG" at 79.104,21.141 h1.27
  text "DNPS-X2" at 57.654,20.254 h1.02
  text "DNPS-X4" at 78.404,13.329 h1.02
  text "GND" at 59.471,10.404 h1.02 r90
  text "+5V_EXT" at 69.477,10.179 h1.02 r90
  text "+3.3V_EXT" at 64.452,10.029 h1.02 r90
  text "GND" at 48.896,9.554 h0.76 r90
  text "+V_BAT" at 50.944,8.954 h0.76 r90
  text "SWD" at 9.004,3.304 h1.02
  text "CHARGE ONLY" at 43.371,1.954 h1.02 r90
  text "EXC_NEG" at 78.779,1.241 h1.27
  text "3.7V/4.2V ONLY" at 54.171,1.104 h1.02 r90
Bottom Overlay:
  rectangle: 31.975,9.25 51.625,13.55
  text "BIO IMPEDANCE DEV BOARD" at 72.771,26.304 h1.52
  text "VERSION A" at 72.771,22.466 h1.52
  text "LUCAS CHURCH" at 72.771,18.629 h1.52
  text "GITHUB.COM/LUCASCHURCH/BIOIMPEDANCE-SPECTROMETER" at 72.771,14.792 h1.52
  text "SERIAL NUMBER:" at 72.771,10.954 h1.52